# Altium PCB PCB Uno-BMS.PcbDoc
Units mil, origin at the board's own origin, x right, y up, seen from the top; angles counter-clockwise.
Board outline 2702.76 x 2098.43 mil, 2 copper layers (L1, L2), stack 65.8 mil thick; 126 components, 129 nets, 340 pads, 63 vias.
Unrouted connection lines stored in the file: 3.
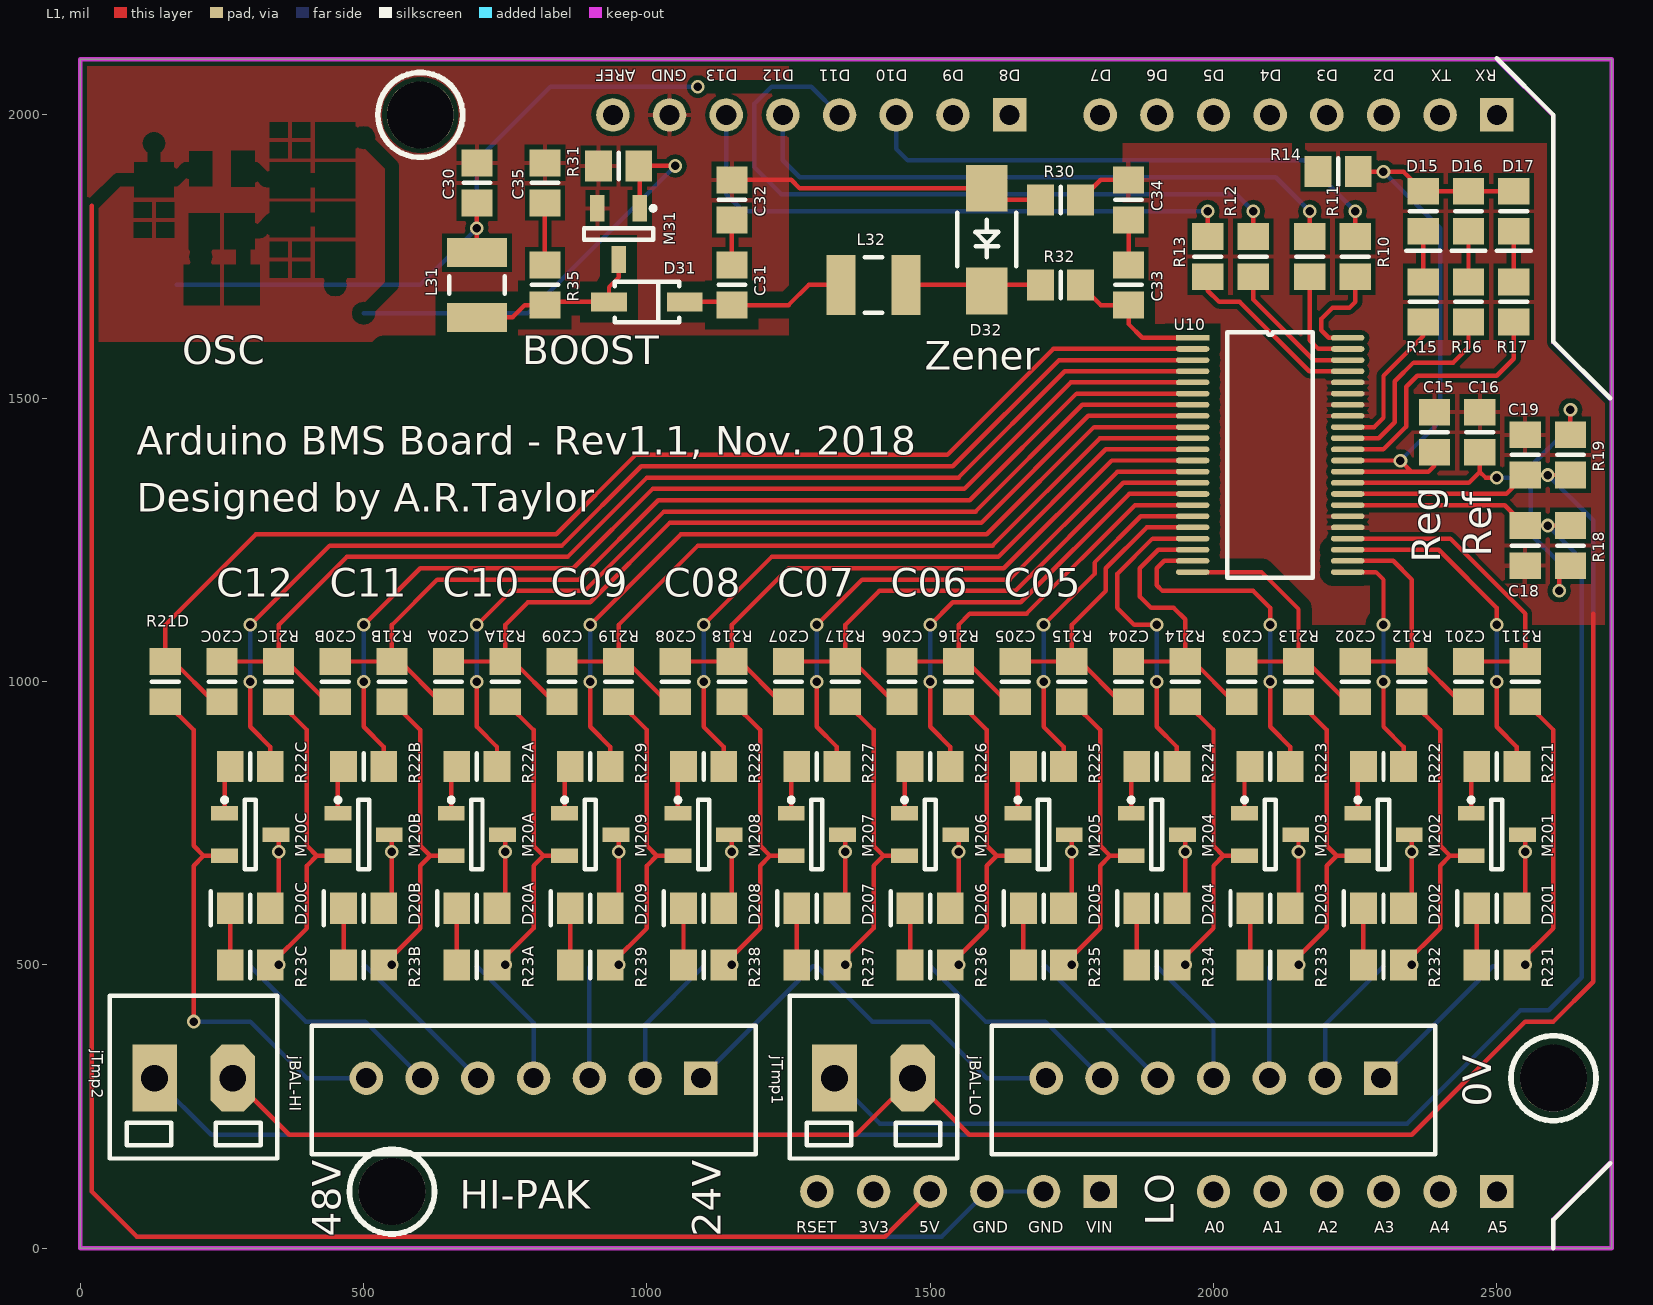
[diagram p0: L1 view]
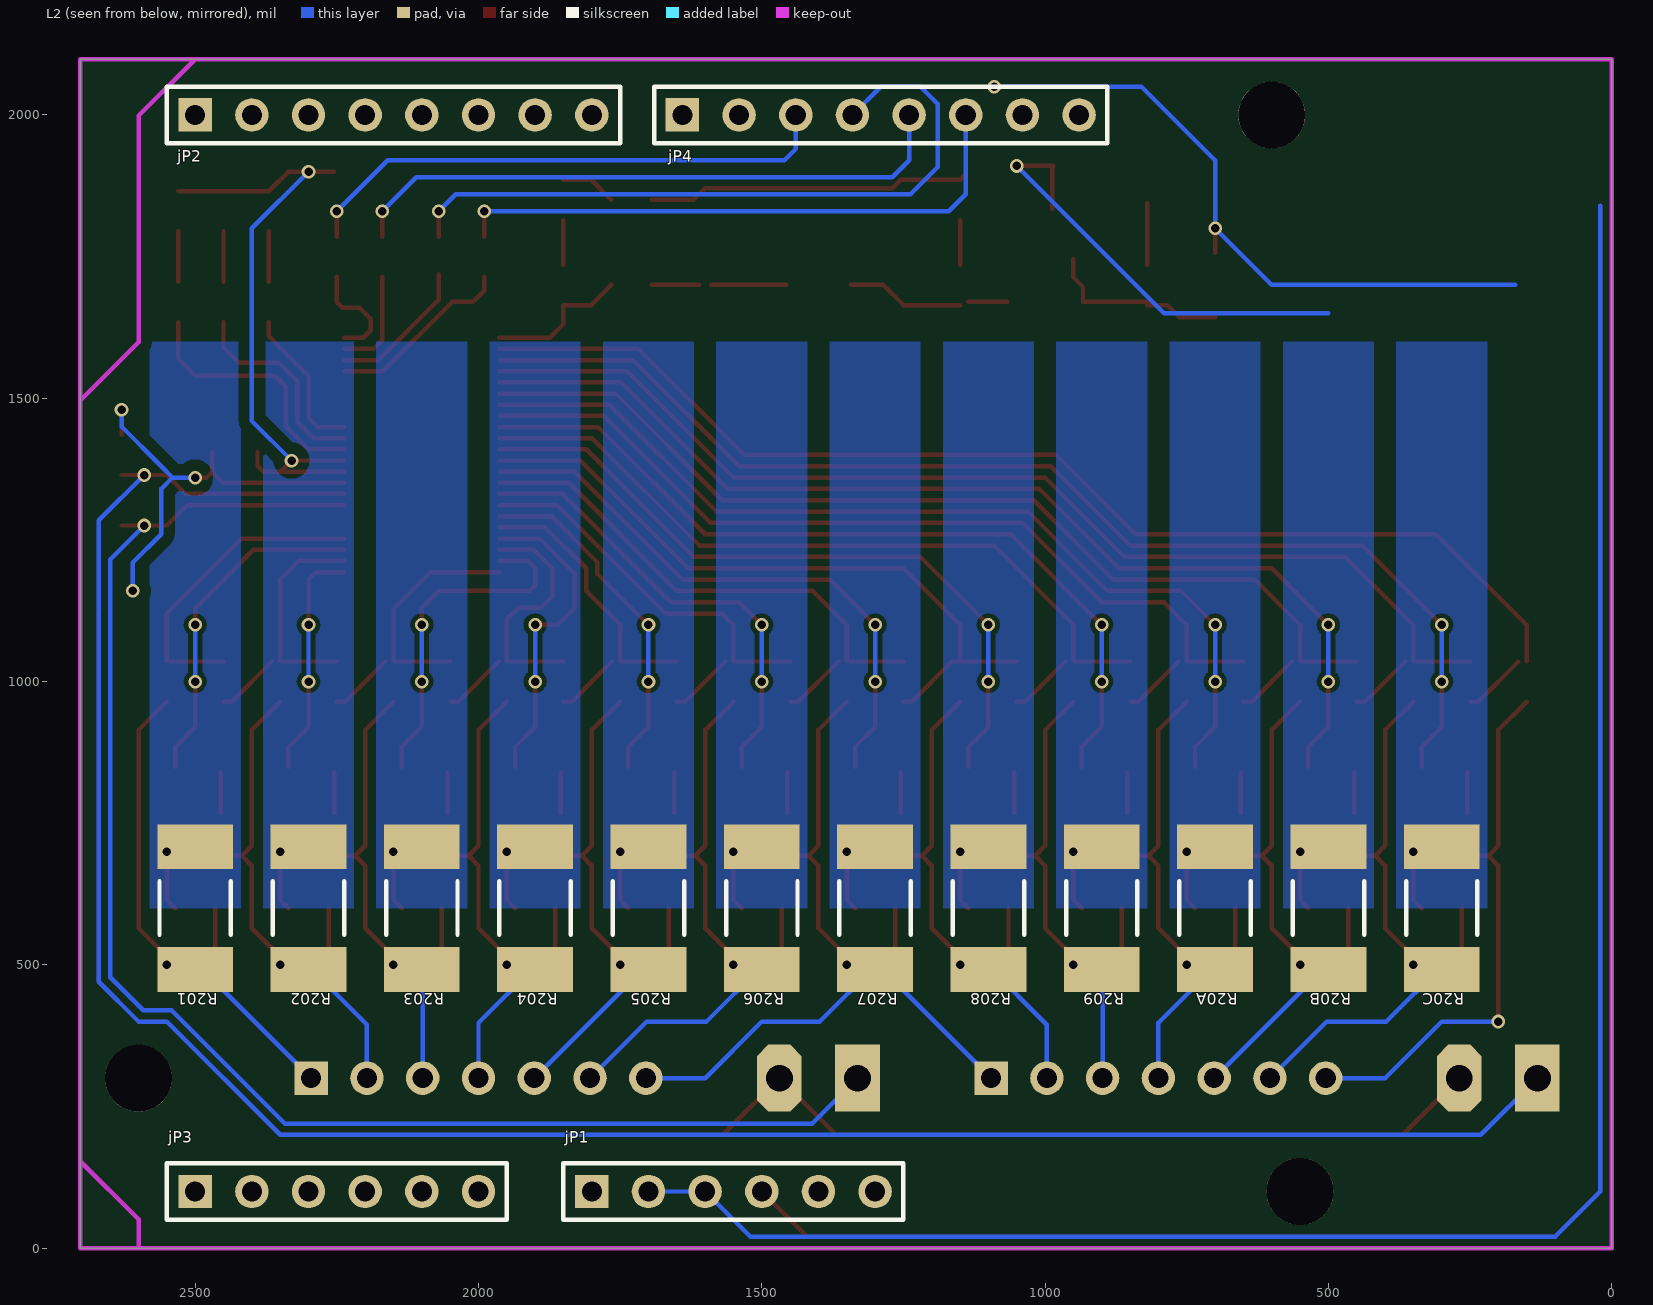
[diagram p1: L2 view, seen from below]

## Layer stack, top to bottom
L1: signal copper 1.4
Dielectric: core 63, FR-4, Dk 4.8
L2: signal copper 1.4

## Board outline
0,0 2702.76,0 2702.76,2098.43 0,2098.43

## Design rules (kind name [scope] priority, off if disabled: settings)
AssemblyTestPointUsage [All] p1 off:
AssemblyTestpoint [All] p1: testpointundercomponent=FALSE minsize=40 maxsize=100 preferedsize=60 minholesize=0 maxholesize=40 preferedholesize=32 testpointgrid=3.94 usegrid=TRUE gridoriginx=3496.06 gridoriginy=3000 gridtolerance=0.01 allowsidetop=TRUE allowsidebottom=TRUE
Clearance "Mount Holes" [HoleDiameter >= 3] p1 off: gap=20
Clearance HighSide [InNet('+Vb') vs InNet('C12')] p2: gap=8
Clearance LowSide [InNet('-Vb') vs InNet('C0')] p3: gap=8
Clearance HV2All [InNetClass('HV Nets') vs NOT InNetClass('HV Nets')] p4: gap=20
Clearance MV2All [InNetClass('MV Nets') vs NOT InNetClass('MV Nets')] p5: gap=20
Clearance LV2LV [All] p6: gap=8
ComponentClearance "Arduino Uno" [Id=('Arduino-UNO') vs HasFootprint('HDR1X*')] p1: gap=0 collisioncheckmode=3 verticalgap=0 showdistances=FALSE
ComponentClearance [All] p2: gap=7.87 collisioncheckmode=3 verticalgap=7.87 showdistances=FALSE
DiffPairsRouting [All] p1: maxlimit=78.74 minlimit=7.87 mostfreqgap=7.87 maxuncoupledlength=500
FabricationTestPointUsage [All] p1 off: valid=0 allowmultiple=FALSE
FabricationTestpoint [All] p1: side=3 testpointundercomponent=FALSE minsize=40 maxsize=100 preferedsize=60 minholesize=0 maxholesize=40 preferedholesize=32 testpointgrid=3.94 allowsidetop=TRUE allowsidebottom=TRUE usegrid=TRUE gridoriginx=3496.06 gridoriginy=3000 gridtolerance=0.01
Height [All] p1: minheight=0 maxheight=2362.2 prefheight=500
HoleSize [All] p1: absolutevalues=TRUE maxlimit=984.25 minlimit=1.97 maxpercent=80.000 minpercent=20.000
HoleToHoleClearance [All] p1: gap=7.87 allowstackedmicrovias=TRUE
MinimumSolderMaskSliver [All] p1: minsoldermaskwidth=1
PlaneClearance [All] p1: clearance=19.68
PlaneConnect [All] p1: planeconnectstyle=Relief reliefexpansion=19.68 reliefentries=4 reliefconductorwidth=9.84 reliefairgap=9.84
PolygonConnect HeatSinks [InNet('BALR*')] p1: connectstyle=Direct reliefconductorwidth=10 reliefentries=4 polygonreliefangle="90 Angle"
PolygonConnect SolidVia [ViaSize = 0.65] p2: connectstyle=Direct reliefconductorwidth=10 reliefentries=4 polygonreliefangle="90 Angle"
PolygonConnect PolyConnect [All vs IsPolygon] p3: connectstyle=Relief reliefconductorwidth=8 reliefentries=4 polygonreliefangle="90 Angle"
RoomDefinition 1 [InComponentClass('1')] p1: confinementstyle=ConfineIn formatcopy=FALSE lockcomponents=FALSE outline 2600,400 2600,1100 2400,1100 2400,400
RoomDefinition C [InComponentClass('C')] p2: confinementstyle=ConfineIn formatcopy=TRUE lockcomponents=FALSE outline 400,400 400,1100 200,1100 200,400
RoomDefinition B [InComponentClass('B')] p3: confinementstyle=ConfineIn formatcopy=TRUE lockcomponents=FALSE outline 600,400 600,1100 400,1100 400,400
RoomDefinition A [InComponentClass('A')] p4: confinementstyle=ConfineIn formatcopy=TRUE lockcomponents=FALSE outline 800,400 800,1100 600,1100 600,400
RoomDefinition 9 [InComponentClass('9')] p5: confinementstyle=ConfineIn formatcopy=TRUE lockcomponents=FALSE outline 1000,400 1000,1100 800,1100 800,400
RoomDefinition 8 [InComponentClass('8')] p6: confinementstyle=ConfineIn formatcopy=TRUE lockcomponents=FALSE outline 1200,400 1200,1100 1000,1100 1000,400
RoomDefinition 7 [InComponentClass('7')] p7: confinementstyle=ConfineIn formatcopy=TRUE lockcomponents=FALSE outline 1400,400 1400,1100 1200,1100 1200,400
RoomDefinition 6 [InComponentClass('6')] p8: confinementstyle=ConfineIn formatcopy=TRUE lockcomponents=FALSE outline 1600,400 1600,1100 1400,1100 1400,400
RoomDefinition 5 [InComponentClass('5')] p9: confinementstyle=ConfineIn formatcopy=TRUE lockcomponents=FALSE outline 1800,400 1800,1100 1600,1100 1600,400
RoomDefinition 4 [InComponentClass('4')] p10: confinementstyle=ConfineIn formatcopy=TRUE lockcomponents=FALSE outline 2000,400 2000,1100 1800,1100 1800,400
RoomDefinition 3 [InComponentClass('3')] p11: confinementstyle=ConfineIn formatcopy=TRUE lockcomponents=FALSE outline 2200,400 2200,1100 2000,1100 2000,400
RoomDefinition 2 [InComponentClass('2')] p12: confinementstyle=ConfineIn formatcopy=TRUE lockcomponents=FALSE outline 2400,400 2400,1100 2200,1100 2200,400
RoutingVias [All] p1: holewidth=19.68 width=29.53 viastyle="Through Hole" minholewidth=15 minwidth=23.62 maxholewidth=39.37 maxwidth=49.21
SilkToSilkClearance [All] p1: silktosilkclearance=2
SilkscreenOverComponentPads [IsPad] p1: minsilkscreentomaskgap=1.97
SolderMaskExpansion [All] p1: expansion=4
Width [All] p1: maxlimit=196.85 minlimit=7.87 preferedwidth=7.87
14 further rules are at their usual default settings.

## Classes and differential pairs
component class A: C20A C21A C22A C23A C24A C25A C26A C27A C28A D20A D21A jPhA M20A M21A M22A Q20A Q25A R20A R21A R22A R23A R24A R26A R27A R28A U21A U22A
component class B: C20B C21B C22B C23B C24B C25B C26B C27B C28B D20B D21B jPhB M20B M21B M22B Q20B Q25B R20B R21B R22B R23B R24B R26B R27B R28B U21B U22B
component class C: C20C C21C C22C C23C C24C C25C C26C C27C C28C D20C D21C jPhC M20C M21C M22C Q20C Q25C R20C R21C R22C R23C R24C R26C R27C R28C U21C U22C
net class "HV Nets": +VB NetC31_1 NetD31_1 NetD32_2
net class "LV Nets": 3V3 5V -VB A0 A1 A2 A3 A4 A5 AREF CSEL D2 D3 D4 D5 D6 D7 D8 D9 D10 D11 D12 D13 GND IO1 IO2 MISO MOSI NetD15_2 NetD16_2 NetD17_2 PWM9 PWM11 RESET RX SCLK TX VIN VREF VREG VTMP1 VTMP2 WD
component class 1: C201 D201 M201 R201 R211 R221 R231
component class 2: C202 D202 M202 R202 R212 R222 R232
component class 3: C203 D203 M203 R203 R213 R223 R233
component class 4: C204 D204 M204 R204 R214 R224 R234
component class 5: C205 D205 M205 R205 R215 R225 R235
component class 6: C206 D206 M206 R206 R216 R226 R236
component class 7: C207 D207 M207 R207 R217 R227 R237
component class 8: C208 D208 M208 R208 R218 R228 R238
component class 9: C209 D209 M209 R209 R219 R229 R239
net class "MV Nets": BALD1 BALD2 BALD3 BALD4 BALD5 BALD6 BALD7 BALD8 BALD9 BALDA BALDB BALDC BALG1 BALG2 BALG3 BALG4 BALG5 BALG6 BALG7 BALG8 BALG9 BALGA BALGB BALGC BALR1 BALR2 BALR3 BALR4 BALR5 BALR6 BALR7 BALR8 BALR9 BALRA BALRB BALRC C0 C1 C2 C3 C4 C5 C6 C7 C8 C9 C10 C11 C12 CELL0 CELL1 CELL2 CELL3 CELL4 CELL5 CELL6 CELL7 CELL8 CELL9 CELLA CELLB CELLC S1 S2 S3 S4 S5 S6 S7 S8 S9 S10 S11 S12
channel class "SCH Uno-CellTap": 1 2 3 4 5 6 7 8 9 A B C

## Components (designator, comment, footprint, x,y, rotation, side; value= is the part's Value field where it differs from the comment)
C15 "CL21F105ZBFNNNE" CAPC2012N 2390,1440 r270 top
C16 "CL21F105ZBFNNNE" CAPC2012N 2470,1440 r270 top
C18 "CL21F105ZBFNNNE" CAPC2012N 2550,1240 r90 top
C19 "CL21F105ZBFNNNE" CAPC2012N 2550,1400 r270 top
C20A "CL21F105ZBFNNNE" CAPC2012N 650,1000 r90 top (schematic designator C20)
C20B "CL21F105ZBFNNNE" CAPC2012N 450,1000 r90 top (schematic designator C20)
C20C "CL21F105ZBFNNNE" CAPC2012N 250,1000 r90 top (schematic designator C20)
C30 "CL21F105ZBFNNNE" CAPC2012N 700,1880 r90 top
C31 "CL21F105ZBFNNNE" CAPC2012N 1150,1700 r90 top
C32 "CL21F105ZBFNNNE" CAPC2012N 1150,1850 r90 top
C33 "CL21F105ZBFNNNE" CAPC2012N 1850,1700 r90 top
C34 "CL21F105ZBFNNNE" CAPC2012N 1850,1850 r90 top
C35 "C0805C102K1RACTU" CAPC2012N 820,1880 r90 top
C201 "CL21F105ZBFNNNE" CAPC2012N 2450,1000 r90 top (schematic designator C20)
C202 "CL21F105ZBFNNNE" CAPC2012N 2250,1000 r90 top (schematic designator C20)
C203 "CL21F105ZBFNNNE" CAPC2012N 2050,1000 r90 top (schematic designator C20)
C204 "CL21F105ZBFNNNE" CAPC2012N 1850,1000 r90 top (schematic designator C20)
C205 "CL21F105ZBFNNNE" CAPC2012N 1650,1000 r90 top (schematic designator C20)
C206 "CL21F105ZBFNNNE" CAPC2012N 1450,1000 r90 top (schematic designator C20)
C207 "CL21F105ZBFNNNE" CAPC2012N 1250,1000 r90 top (schematic designator C20)
C208 "CL21F105ZBFNNNE" CAPC2012N 1050,1000 r90 top (schematic designator C20)
C209 "CL21F105ZBFNNNE" CAPC2012N 850,1000 r90 top (schematic designator C20)
D15 "LTST-C170GKT" DIO2012N-G 2370,1830 r270 top
D16 "LTST-C170YKT" DIO2012N-Y 2450,1830 r270 top
D17 "LTST-C170CKT" DIO2012N-R 2530,1830 r270 top
D20A "LTST-C170YKT" DIO2012N-Y 700,600 r180 top (schematic designator D20)
D20B "LTST-C170YKT" DIO2012N-Y 500,600 r180 top (schematic designator D20)
D20C "LTST-C170YKT" DIO2012N-Y 300,600 r180 top (schematic designator D20)
D31 "SMD110PL-TP" SOD123 1000,1670 r180 top
D32 "SMAJ54A" DO214-SMA 1600,1780 r270 top
D201 "LTST-C170YKT" DIO2012N-Y 2500,600 r180 top (schematic designator D20)
D202 "LTST-C170YKT" DIO2012N-Y 2300,600 r180 top (schematic designator D20)
D203 "LTST-C170YKT" DIO2012N-Y 2100,600 r180 top (schematic designator D20)
D204 "LTST-C170YKT" DIO2012N-Y 1900,600 r180 top (schematic designator D20)
D205 "LTST-C170YKT" DIO2012N-Y 1700,600 r180 top (schematic designator D20)
D206 "LTST-C170YKT" DIO2012N-Y 1500,600 r180 top (schematic designator D20)
D207 "LTST-C170YKT" DIO2012N-Y 1300,600 r180 top (schematic designator D20)
D208 "LTST-C170YKT" DIO2012N-Y 1100,600 r180 top (schematic designator D20)
D209 "LTST-C170YKT" DIO2012N-Y 900,600 r180 top (schematic designator D20)
jBAL-HI "B7B-XH-A" JST-XH-B7 800,300 r180 top
jBAL-LO "B7B-XH-A" JST-XH-B7 2000,300 r180 top
jP1 "SSW-106-03-T-S" HDR1X6 1550,100 r180 bottom locked
jP2 "SSW-108-03-T-S" HDR1X8 2150,2000 r180 bottom locked
jP3 "SSW-106-03-T-S" HDR1X6 2250,100 r180 bottom locked
jP4 "SSW-108-03-T-S" HDR1X8 1290,2000 r180 bottom locked
jTmp1 "1751248" TERM2x3.5mm 1400,300 r0 top
jTmp2 "1751248" TERM2x3.5mm 200,300 r0 top
L31 "BRL3225T101K" INDC3225N 700,1700 r270 top
L32 "BRL3225T101K" INDC3225N 1400,1700 r0 top
M20A "NTR5105PT1G" SOT23-3N 700,730 r0 top (schematic designator M20)
M20B "NTR5105PT1G" SOT23-3N 500,730 r0 top (schematic designator M20)
M20C "NTR5105PT1G" SOT23-3N 300,730 r0 top (schematic designator M20)
M31 "BSS119NH6327XTSA1" SOT23-3N 950,1790 r270 top
M201 "NTR5105PT1G" SOT23-3N 2500,730 r0 top (schematic designator M20)
M202 "NTR5105PT1G" SOT23-3N 2300,730 r0 top (schematic designator M20)
M203 "NTR5105PT1G" SOT23-3N 2100,730 r0 top (schematic designator M20)
M204 "NTR5105PT1G" SOT23-3N 1900,730 r0 top (schematic designator M20)
M205 "NTR5105PT1G" SOT23-3N 1700,730 r0 top (schematic designator M20)
M206 "NTR5105PT1G" SOT23-3N 1500,730 r0 top (schematic designator M20)
M207 "NTR5105PT1G" SOT23-3N 1300,730 r0 top (schematic designator M20)
M208 "NTR5105PT1G" SOT23-3N 1100,730 r0 top (schematic designator M20)
M209 "NTR5105PT1G" SOT23-3N 900,730 r0 top (schematic designator M20)
R10 "ERJ-6ENF10R0V" RESC2012N 2250,1750 r90 top
R11 "ERJ-6ENF10R0V" RESC2012N 2170,1750 r90 top
R12 "ERJ-6ENF10R0V" RESC2012N 2070,1750 r90 top
R13 "ERJ-6ENF10R0V" RESC2012N 1990,1750 r90 top
R14 "ERJ-6ENF10R0V" RESC2012N 2220,1900 r180 top
R15 "ERJ-6ENF1001V" RESC2012N 2370,1670 r270 top
R16 "ERJ-6ENF1001V" RESC2012N 2450,1670 r270 top
R17 "ERJ-6ENF1001V" RESC2012N 2530,1670 r270 top
R18 "ERJ-6ENF1003V" RESC2012N 2630,1240 r90 top
R19 "ERJ-6ENF1003V" RESC2012N 2630,1400 r270 top
R20A "RMCF2512FT49R9" RESC6432N 700,600 r90 bottom (schematic designator R20)
R20B "RMCF2512FT49R9" RESC6432N 500,600 r90 bottom (schematic designator R20)
R20C "RMCF2512FT49R9" RESC6432N 300,600 r90 bottom (schematic designator R20)
R21A "ERJ-6ENF1000V" RESC2012N 750,1000 r90 top (schematic designator R21)
R21B "ERJ-6ENF1000V" RESC2012N 550,1000 r90 top (schematic designator R21)
R21C "ERJ-6ENF1000V" RESC2012N 350,1000 r90 top (schematic designator R21)
R21D "ERJ-6ENF1000V" RESC2012N 150,1000 r90 top
R22A "ERJ-6ENF1001V" RESC2012N 700,850 r180 top (schematic designator R22)
R22B "ERJ-6ENF1001V" RESC2012N 500,850 r180 top (schematic designator R22)
R22C "ERJ-6ENF1001V" RESC2012N 300,850 r180 top (schematic designator R22)
R23A "ERJ-6ENF1001V" RESC2012N 700,500 r180 top (schematic designator R23)
R23B "ERJ-6ENF1001V" RESC2012N 500,500 r180 top (schematic designator R23)
R23C "ERJ-6ENF1001V" RESC2012N 300,500 r180 top (schematic designator R23)
R30 "ERJ-6ENF10R0V" RESC2012N 1730,1850 r0 top
R31 "ERJ-6ENF1002V" RESC2012N 950,1910 r180 top
R32 "ERJ-6ENF1000V" RESC2012N 1730,1700 r0 top
R35 "ERJ-6ENF1001V" RESC2012N 820,1700 r90 top
R201 "RMCF2512FT49R9" RESC6432N 2500,600 r90 bottom (schematic designator R20)
R202 "RMCF2512FT49R9" RESC6432N 2300,600 r90 bottom (schematic designator R20)
R203 "RMCF2512FT49R9" RESC6432N 2100,600 r90 bottom (schematic designator R20)
R204 "RMCF2512FT49R9" RESC6432N 1900,600 r90 bottom (schematic designator R20)
R205 "RMCF2512FT49R9" RESC6432N 1700,600 r90 bottom (schematic designator R20)
R206 "RMCF2512FT49R9" RESC6432N 1500,600 r90 bottom (schematic designator R20)
R207 "RMCF2512FT49R9" RESC6432N 1300,600 r90 bottom (schematic designator R20)
R208 "RMCF2512FT49R9" RESC6432N 1100,600 r90 bottom (schematic designator R20)
R209 "RMCF2512FT49R9" RESC6432N 900,600 r90 bottom (schematic designator R20)
R211 "ERJ-6ENF1000V" RESC2012N 2550,1000 r90 top (schematic designator R21)
R212 "ERJ-6ENF1000V" RESC2012N 2350,1000 r90 top (schematic designator R21)
R213 "ERJ-6ENF1000V" RESC2012N 2150,1000 r90 top (schematic designator R21)
R214 "ERJ-6ENF1000V" RESC2012N 1950,1000 r90 top (schematic designator R21)
R215 "ERJ-6ENF1000V" RESC2012N 1750,1000 r90 top (schematic designator R21)
R216 "ERJ-6ENF1000V" RESC2012N 1550,1000 r90 top (schematic designator R21)
R217 "ERJ-6ENF1000V" RESC2012N 1350,1000 r90 top (schematic designator R21)
R218 "ERJ-6ENF1000V" RESC2012N 1150,1000 r90 top (schematic designator R21)
R219 "ERJ-6ENF1000V" RESC2012N 950,1000 r90 top (schematic designator R21)
R221 "ERJ-6ENF1001V" RESC2012N 2500,850 r180 top (schematic designator R22)
R222 "ERJ-6ENF1001V" RESC2012N 2300,850 r180 top (schematic designator R22)
R223 "ERJ-6ENF1001V" RESC2012N 2100,850 r180 top (schematic designator R22)
R224 "ERJ-6ENF1001V" RESC2012N 1900,850 r180 top (schematic designator R22)
R225 "ERJ-6ENF1001V" RESC2012N 1700,850 r180 top (schematic designator R22)
R226 "ERJ-6ENF1001V" RESC2012N 1500,850 r180 top (schematic designator R22)
R227 "ERJ-6ENF1001V" RESC2012N 1300,850 r180 top (schematic designator R22)
R228 "ERJ-6ENF1001V" RESC2012N 1100,850 r180 top (schematic designator R22)
R229 "ERJ-6ENF1001V" RESC2012N 900,850 r180 top (schematic designator R22)
R231 "ERJ-6ENF1001V" RESC2012N 2500,500 r180 top (schematic designator R23)
R232 "ERJ-6ENF1001V" RESC2012N 2300,500 r180 top (schematic designator R23)
R233 "ERJ-6ENF1001V" RESC2012N 2100,500 r180 top (schematic designator R23)
R234 "ERJ-6ENF1001V" RESC2012N 1900,500 r180 top (schematic designator R23)
R235 "ERJ-6ENF1001V" RESC2012N 1700,500 r180 top (schematic designator R23)
R236 "ERJ-6ENF1001V" RESC2012N 1500,500 r180 top (schematic designator R23)
R237 "ERJ-6ENF1001V" RESC2012N 1300,500 r180 top (schematic designator R23)
R238 "ERJ-6ENF1001V" RESC2012N 1100,500 r180 top (schematic designator R23)
R239 "ERJ-6ENF1001V" RESC2012N 900,500 r180 top (schematic designator R23)
U10 "LTC6803-4" SSOP44 2100,1400 r0 top

## Footprints (in the part's own frame and the unit in brackets; to place one, negate y for a bottom-side part, rotate by r counter-clockwise, add the part's x,y. Pads: shape width x height; smd on the part's side, far side on the other; paste and mask are expansions set on the pad)
CAPC2012N [mm] "Chip Capacitor, Body 2.0x1.3mm, IPC Medium Density"
  rect 1.2x1.4 smd: 1(-0.9,0) 2(0.9,0)
  silkscreen extent 0,-0.6 0,0.6, body extent -1.07,-0.7 1.07,0.7, height 0.7
DIO2012N-G [mm] "Chip Diode, Body 2.0x1.2mm, Medium Density"
  rect 1.2x1.4 smd: 1(-0.9,0) 2(0.9,0)
  silkscreen extent 0,-0.76 1.78,0.76, body extent -1.07,-0.7 1.07,0.7, height 0.7
DIO2012N-R [mm] "Chip Diode, Body 2.0x1.2mm, Medium Density"
  rect 1.2x1.4 smd: 1(-0.9,0) 2(0.9,0)
  silkscreen extent 0,-0.76 1.78,0.76, body extent -1.07,-0.7 1.07,0.7, height 0.7
DIO2012N-Y [mm] "Chip Diode, Body 2.0x1.2mm, Medium Density"
  rect 1.2x1.4 smd: 1(-0.9,0) 2(0.9,0)
  silkscreen extent 0,-0.76 1.78,0.76, body extent -1.07,-0.7 1.07,0.7, height 0.7
DO214-SMA [mm] "DO-214-AC/SMA; 2 C-Bend Leads; Body 5.3 x 2.6 mm, inc. leads (LxW)"
  rect 2.1x1.85 smd: 1(-2.3,0) 2(2.3,0)
  silkscreen extent -1.2,-1.33 1.2,1.33, body extent -2.5,-1.35 2.5,1.35, height 2.2
HDR1X6 [mm] "Connector; Header; 6 Position"
  rect 1.5x1.5 hole 0.9: 1(-6.35,0)
  round 1.5 hole 0.9: 2(-3.81,0) 3(-1.27,0) 4(1.27,0) 5(3.81,0) 6(6.35,0)
  silkscreen extent -7.62,-1.27 7.62,1.27, body extent -7.62,-1.27 7.62,1.27, height 8
HDR1X8 [mm] "Connector; Header; 8 Position"
  rect 1.5x1.5 hole 0.9: 1(-8.89,0)
  round 1.5 hole 0.9: 2(-6.35,0) 3(-3.81,0) 4(-1.27,0) 5(1.27,0) 6(3.81,0) 7(6.35,0) 8(8.89,0)
  silkscreen extent -10.16,-1.27 10.16,1.27, body extent -10.16,-1.27 10.16,1.27, height 8
INDC3225N [mm] "Chip Inductor, Body 3.2x2.5mm, IPC Medium Density"
  rect 1.3x2.7 smd: 1(-1.45,0) 2(1.45,0)
  silkscreen extent -0.4,-1.25 0.4,1.25, body extent -1.7,-1.35 1.7,1.35, height 1.5
JST-XH-B7 [mm] "Locking Connector; Top-Entry; Header; 7 Position"
  rect 1.5x1.5 hole 0.9: 1(-7.5,0)
  round 1.5 hole 0.9: 2(-5,0) 3(-2.5,0) 4(0,0) 5(2.5,0) 6(5,0) 7(7.5,0)
  silkscreen extent -9.95,-2.35 9.95,3.4, body extent -9.95,-2.35 9.95,3.4, height 7
RESC2012N [mm] "Chip Resistor, Body 2.0x1.2mm, IPC Medium Density"
  rect 1.2x1.4 smd: 1(-0.9,0) 2(0.9,0)
  silkscreen extent 0,-0.6 0,0.6, body extent -1.07,-0.7 1.07,0.7, height 0.7
RESC6432N [mm] "Chip Resistor, Body 6.4x3.2mm, IPC Medium Density"
  rect 2x3.4 smd: 1(-2.75,0) 2(2.75,0)
  silkscreen extent -1.2,-1.6 1.2,1.6, body extent -3.3,-1.7 3.3,1.7, height 1.2
SOD123 [mm] "SOD-123; 2 Leads; Body 2.7 x 1.6 mm, (LxW)"
  rect 1.6x0.85 smd: 1(1.7,0) 2(-1.7,0)
  silkscreen extent -1.45,-0.9 1.45,0.9, body extent -1.95,-0.9 1.95,0.9, height 1.18
SOT23-3N [mm] "SOT23, 3-Leads, Body 2.9x1.3mm, Pitch 0.95mm, Lead Span 2.8mm, IPC Medium Density"
  rect 1.2x0.65 smd: 1(-1.15,0.95) 2(-1.15,-0.95) 3(1.15,0)
  silkscreen extent -1.25,-1.55 0.25,1.65, body extent -1.25,-1.5 1.25,1.5, height 1
SSOP44 [mm] "44-Lead Plastic SSOP, 5.3mm width, 0.5mm pitch"
  rect 1.5x0.25 smd: 1(-3.475,5.25)
  oval 1.5x0.25 smd: 2(-3.475,4.75) 3(-3.475,4.25) 4(-3.475,3.75) 5(-3.475,3.25) 6(-3.475,2.75) 7(-3.475,2.25) 8(-3.475,1.75) 9(-3.475,1.25) 10(-3.475,0.75) 11(-3.475,0.25) 12(-3.475,-0.25) 13(-3.475,-0.75) 14(-3.475,-1.25) 15(-3.475,-1.75) 16(-3.475,-2.25) 17(-3.475,-2.75) 18(-3.475,-3.25) 19(-3.475,-3.75) 20(-3.475,-4.25) 21(-3.475,-4.75) 22(-3.475,-5.25) 23(3.475,-5.25) 24(3.475,-4.75) 25(3.475,-4.25) 26(3.475,-3.75) 27(3.475,-3.25) 28(3.475,-2.75) 29(3.475,-2.25) 30(3.475,-1.75) 31(3.475,-1.25) 32(3.475,-0.75) 33(3.475,-0.25) 34(3.475,0.25) 35(3.475,0.75) 36(3.475,1.25) 37(3.475,1.75) 38(3.475,2.25) 39(3.475,2.75) 40(3.475,3.25) 41(3.475,3.75) 42(3.475,4.25) 43(3.475,4.75) 44(3.475,5.25)
  silkscreen extent -1.91,-5.5 1.91,5.5, body extent -2.65,-6.4 2.65,6.4, height 2
TERM2x3.5mm [mm] "Terminal Block Connector; 2 Position, 3.5mm Pitch"
  rect 2x3 hole 1.2: 1(-1.75,0)
  oct 2x3 hole 1.2: 2(1.75,0)
  silkscreen extent -3.75,-3.6 3.75,3.7, body extent -3.75,-3.6 3.75,3.7, height 8.5

## Part data
C15 C16 C18 C19 C20A C20B C20C C30 C31 C32 C33 C34 C35 C201 C202 C203 C204 C205 C206 C207 C208 C209: library part Cap, "Capacitor"
D15: "SMT Green Si LED"
D16 D20A D20B D20C D201 D202 D203 D204 D205 D206 D207 D208 D209: "SMT Yellow Si LED"
D17: "SMT Red Si LED"
D31: "Silicon Schottky Diode, 1A, 100V"
D32: library part "D Zener", "Zener Diode"
jBAL-HI jBAL-LO: library part "JST B7B-XH-A", "JST Battery Balance Port Header, 7-Pin"
jP1 jP3: library part "Header 6", "Header, 6-Pin"
jP2 jP4: library part "Header 8", "Header, 8-Pin"
jTmp1 jTmp2: library part "Header 2", "Header Conn Term Block, 2-Pin, 3.5mm Pitch"
L31 L32: library part BLM21P221SN, "Ferrite Bead Inductor"
M20A M20B M20C M201 M202 M203 M204 M205 M206 M207 M208 M209: library part MOSFET-P, "P-Channel MOSFET"
M31: library part BSS123, "Low-Power N-Channel MOSFET, 100V 170mA"
R10 R11 R12 R13 R14 R15 R16 R17 R18 R19 R21A R21B R21C R21D R22A R22B R22C R23A R23B R23C R30 R31 R32 R35 R211 R212 R213 R214 R215 R216 R217 R218 R219 R221 R222 R223 R224 R225 R226 R227 R228 R229 R231 R232 R233 R234 R235 R236 R237 R238 R239: library part Res1, "Resistor"
R20A R20B R20C R201 R202 R203 R204 R205 R206 R207 R208 R209: library part Res1, "Resistor, 1W"
U10: "Multicell Battery Stack Monitor"

## Free pads (board coordinates)
  round 118.11 hole 118.11 unplated: 0(550,100) 0(600,2000) 0(2600,300)

## Via types
v1: diameter 24, hole 15, L1 to L2, tented both sides, 63 vias

## Nets (pads, with @x,y where several pads share a name; then routed paths per layer and width w, separated by ;. In a path a pad name is that pad's centre, name@x,y a point inside that pad or via, vN(x,y) a via of type N, cw(c..) or ccw(c..) an arc to the next point about the centre after c; other vN are vias at no path point)
3V3: jP1.5
5V: C30.1 jP1.4 L31.1 R14.2 | length 4509
  L1 w7.87: 20,1840 20,100 100,20 1420,20 jP1.4 ; L31.1 v1(700,1800) C30.1
  L2 w7.87: 170,1700 600,1700 v1(700,1800) 700,1920 830,2050 v1(1090,2050)
+VB: C33.1 R32.2 U10.1 | length 256
  L1 w7.87: R32.2 1800.87,1664.57 C33.1 1850,1631.1 1874.41,1606.69 U10.1
-VB: C15.1 C16.1 C18.1 C19.1 C34.2 jTmp1.2 jTmp2.2 R30.2 U10.27 U10.28 U10.37 U10.38 U10.39 U10.40 | length 3386.4
  L1 w7.87: jTmp2.2 368.9,200 1368.9,200 jTmp1.2 1568.9,200 2350,200 2550,400 2600,400 2670,470 2670,1120 ; R30.2 1800.87,1885.43 C34.2
A0: jP3.6
A1: jP3.5
A2: jP3.4
A3: jP3.3
A4: jP3.2
A5: jP3.1
AREF: jP4.8
BALD1: D201.2 R231.2 | length 100
  L1 w7.87: R231.2 D201.2
BALD2: D202.2 R232.2 | length 100
  L1 w7.87: R232.2 D202.2
BALD3: D203.2 R233.2 | length 100
  L1 w7.87: R233.2 D203.2
BALD4: D204.2 R234.2 | length 100
  L1 w7.87: R234.2 D204.2
BALD5: D205.2 R235.2 | length 100
  L1 w7.87: R235.2 D205.2
BALD6: D206.2 R236.2 | length 100
  L1 w7.87: R236.2 D206.2
BALD7: D207.2 R237.2 | length 100
  L1 w7.87: R237.2 D207.2
BALD8: D208.2 R238.2 | length 100
  L1 w7.87: R238.2 D208.2
BALD9: D209.2 R239.2 | length 100
  L1 w7.87: R239.2 D209.2
BALDA: D20A.2 R23A.2 | length 100
  L1 w7.87: R23A.2 D20A.2
BALDB: D20B.2 R23B.2 | length 100
  L1 w7.87: R23B.2 D20B.2
BALDC: D20C.2 R23C.2 | length 100
  L1 w7.87: R23C.2 D20C.2
BALG1: M201.1 R221.2 | length 72.8
  L1 w7.87: M201.1 R221.2@2454.72,840.16
BALG2: M202.1 R222.2 | length 72.8
  L1 w7.87: M202.1 R222.2@2254.72,840.16
BALG3: M203.1 R223.2 | length 72.8
  L1 w7.87: M203.1 R223.2@2054.72,840.16
BALG4: M204.1 R224.2 | length 72.8
  L1 w7.87: M204.1 R224.2@1854.72,840.16
BALG5: M205.1 R225.2 | length 72.8
  L1 w7.87: M205.1 R225.2@1654.72,840.16
BALG6: M206.1 R226.2 | length 72.8
  L1 w7.87: M206.1 R226.2@1454.72,840.16
BALG7: M207.1 R227.2 | length 72.8
  L1 w7.87: M207.1 R227.2@1254.72,840.16
BALG8: M208.1 R228.2 | length 72.8
  L1 w7.87: M208.1 R228.2@1054.72,840.16
BALG9: M209.1 R229.2 | length 72.8
  L1 w7.87: M209.1 R229.2@854.72,840.16
BALGA: M20A.1 R22A.2 | length 72.8
  L1 w7.87: M20A.1 R22A.2@654.72,840.16
BALGB: M20B.1 R22B.2 | length 72.8
  L1 w7.87: M20B.1 R22B.2@454.72,840.16
BALGC: M20C.1 R22C.2 | length 72.8
  L1 w7.87: M20C.1 R22C.2@254.72,840.16
BALR1: D201.1 M201.3 R201.2 | length 124.6
  L1 w7.87: D201.1 D201.1@2545.28,609.84 ; D201.1@2550,614.57 v1(2550,700) M201.3@2550,725.28
BALR2: D202.1 M202.3 R202.2 | length 124.6
  L1 w7.87: D202.1 D202.1@2345.28,609.84 ; D202.1@2350,614.57 v1(2350,700) M202.3@2350,725.28
BALR3: D203.1 M203.3 R203.2 | length 124.6
  L1 w7.87: D203.1 D203.1@2145.28,609.84 ; D203.1@2150,614.57 v1(2150,700) M203.3@2150,725.28
BALR4: D204.1 M204.3 R204.2 | length 124.6
  L1 w7.87: D204.1 D204.1@1945.28,609.84 ; D204.1@1950,614.57 v1(1950,700) M204.3@1950,725.28
BALR5: D205.1 M205.3 R205.2 | length 124.6
  L1 w7.87: D205.1 D205.1@1745.28,609.84 ; D205.1@1750,614.57 v1(1750,700) M205.3@1750,725.28
BALR6: D206.1 M206.3 R206.2 | length 124.6
  L1 w7.87: D206.1 D206.1@1545.28,609.84 ; D206.1@1550,614.57 v1(1550,700) M206.3@1550,725.28
BALR7: D207.1 M207.3 R207.2 | length 124.6
  L1 w7.87: D207.1 D207.1@1345.28,609.84 ; D207.1@1350,614.57 v1(1350,700) M207.3@1350,725.28
BALR8: D208.1 M208.3 R208.2 | length 124.6
  L1 w7.87: D208.1 D208.1@1145.28,609.84 ; D208.1@1150,614.57 v1(1150,700) M208.3@1150,725.28
BALR9: D209.1 M209.3 R209.2 | length 124.6
  L1 w7.87: D209.1 D209.1@945.28,609.84 ; D209.1@950,614.57 v1(950,700) M209.3@950,725.28
BALRA: D20A.1 M20A.3 R20A.2 | length 124.6
  L1 w7.87: D20A.1 D20A.1@745.28,609.84 ; D20A.1@750,614.57 v1(750,700) M20A.3@750,725.28
BALRB: D20B.1 M20B.3 R20B.2 | length 124.6
  L1 w7.87: D20B.1 D20B.1@545.28,609.84 ; D20B.1@550,614.57 v1(550,700) M20B.3@550,725.28
BALRC: D20C.1 M20C.3 R20C.2 | length 124.6
  L1 w7.87: D20C.1 D20C.1@345.28,609.84 ; D20C.1@350,614.57 v1(350,700) M20C.3@350,725.28
C0: C201.2 R211.2 U10.26 | length 552.6
  L1 w7.87: U10.26 2417.64,1252.36 2550,1120 R211.2 C201.2
C1: C201.1 C202.2 R212.2 U10.24 | length 486.2
  L1 w7.87: U10.24 2317.01,1212.99 2350,1180 R212.2 C202.2 ; R212.2@2364.57,1035.43 2435.43,964.57 C201.1
C2: C202.1 C203.2 R213.2 U10.22 | length 521.2
  L1 w7.87: U10.22 2084.72,1193.31 2150,1128.03 R213.2 C203.2 ; R213.2@2164.57,1035.43 2235.43,964.57 C202.1
C3: C203.1 C204.2 R214.2 U10.20 | length 542.6
  L1 w7.87: C204.2 R214.2 1950,1110 1930,1130 1890,1130 1870,1150 1870,1200 1902.68,1232.68 U10.20 ; R214.2@1964.57,1035.43 2035.43,964.57 C203.1
C4: C204.1 C205.2 R215.2 U10.18 | length 587.2
  L1 w7.87: C205.2 R215.2 1750,1100 1810,1160 1810,1200 1882.05,1272.05 U10.18 ; R215.2@1764.57,1035.43 1835.43,964.57 C204.1
C5: C205.1 C206.2 R216.2 U10.16 | length 780.1
  L1 w7.87: C206.2 R216.2 1550,1100 1570,1120 1670,1120 1861.42,1311.42 U10.16 ; R216.2@1564.57,1035.43 1635.43,964.57 C205.1
C6: C206.1 C207.2 R217.2 U10.14 | length 996.4
  L1 w7.87: C207.2 R217.2 1350,1100 1410,1160 1650,1160 1840.79,1350.79 U10.14 ; R217.2@1364.57,1035.43 1435.43,964.57 C206.1
C7: C207.1 C208.2 R218.2 U10.12 | length 1227.3
  L1 w7.87: C208.2 R218.2 ; C207.1 1235.43,964.57 1164.57,1035.43 R218.2 ; U10.12 1820.16,1390.16 1630,1200 1250,1200 1150,1100 R218.2
C8: C208.1 C209.2 R219.2 U10.10 | length 1429
  L1 w7.87: C209.2 R219.2 950,1100 1090,1240 1610,1240 1799.53,1429.53 U10.10 ; R219.2@964.57,1035.43 1035.43,964.57 C208.1
C9: C20A.2 C209.1 R21A.2 U10.8 | length 1645.3
  L1 w7.87: C20A.2 R21A.2 750,1100 790,1140 900,1140 1040,1280 1590,1280 1778.9,1468.9 U10.8 ; R21A.2@764.57,1035.43 835.43,964.57 C209.1
C10: C20A.1 C20B.2 R21B.2 U10.6 | length 1861.7
  L1 w7.87: C20B.2 R21B.2 550,1100 630,1180 880,1180 1020,1320 1570,1320 1758.27,1508.27 U10.6 ; R21B.2@564.57,1035.43 635.43,964.57 C20A.1
C11: C20B.1 C20C.2 R21C.2 U10.4 | length 2078
  L1 w7.87: C20C.2 R21C.2 350,1100 470,1220 860,1220 1000,1360 1550,1360 1737.64,1547.64 U10.4 ; R21C.2@364.57,1035.43 435.43,964.57 C20B.1
C12: C20C.1 R21D.2 U10.2 | length 2194.3
  L1 w7.87: R21D.2 150,1100 310,1260 840,1260 980,1400 1530,1400 1717.01,1587.01 U10.2 ; R21D.2@164.57,1035.43 235.43,964.57 C20C.1
CELL0: jBAL-LO.1 R201.1 R211.1 R231.1 | length 798.6
  L1 w7.87: R231.1 2600,564.57 2600,914.57 R211.1
  L2 w7.87: jBAL-LO.1 2492.91,497.64 R201.1@2500,497.64
  other v1: 2550,500
CELL1: jBAL-LO.2 M201.2 R202.1 R212.1 R232.1 | length 804.1
  L1 w7.87: R232.1 2400,564.57 2400,675.2 2417.4,692.6 ; R212.1 2400,914.57 2400,710 2417.4,692.6 ; M201.2 2417.4,692.6
  L2 w7.87: jBAL-LO.2 2196.85,394.49 R202.1@2300,497.64
  other v1: 2350,500
CELL2: jBAL-LO.3 M202.2 R203.1 R213.1 R233.1 | length 759.8
  L1 w7.87: R233.1 2200,564.57 2200,675.2 2217.4,692.6 ; R213.1 2200,914.57 2200,710 2217.4,692.6 ; M202.2 2217.4,692.6
  L2 w7.87: jBAL-LO.3 R203.1@2098.43,496.06
  other v1: 2150,500
CELL3: jBAL-LO.4 M203.2 R204.1 R214.1 R234.1 | length 802.8
  L1 w7.87: R234.1 2000,564.57 2000,675.2 2017.4,692.6 ; R214.1 2000,914.57 2000,710 2017.4,692.6 ; M203.2 2017.4,692.6
  L2 w7.87: R204.1@1900,497.64 2000,397.64 jBAL-LO.4
  other v1: 1950,500
CELL4: jBAL-LO.5 M204.2 R205.1 R215.1 R235.1 | length 847.2
  L1 w7.87: R235.1 1800,564.57 1800,675.2 1817.4,692.6 ; R215.1 1800,914.57 1800,710 1817.4,692.6 ; M204.2 1817.4,692.6
  L2 w7.87: R205.1@1700,497.64 1703.94,497.64 jBAL-LO.5
  other v1: 1750,500
CELL5: jBAL-LO.6 M205.2 R206.1 R216.1 R236.1 | length 948.8
  L1 w7.87: R236.1 1600,564.57 1600,675.2 1617.4,692.6 ; R216.1 1600,914.57 1600,710 1617.4,692.6 ; M205.2 1617.4,692.6
  L2 w7.87: R206.1@1500,497.64 1597.64,400 1703.15,400 jBAL-LO.6
  other v1: 1550,500
CELL6: jBAL-HI.1 jBAL-LO.7 M206.2 R207.1 R217.1 R237.1 | length 1336.9
  L1 w7.87: R237.1 1400,564.57 1400,675.2 1417.4,692.6 ; R217.1 1400,914.57 1400,710 1417.4,692.6 ; M206.2 1417.4,692.6
  L2 w7.87: jBAL-HI.1 1292.91,497.64 1300,497.64 1397.64,400 1500,400 1600,300 jBAL-LO.7
  other v1: 1350,500
CELL7: jBAL-HI.2 M207.2 R208.1 R218.1 R238.1 | length 804.1
  L1 w7.87: R238.1 1200,564.57 1200,675.2 1217.4,692.6 ; R218.1 1200,914.57 1200,710 1217.4,692.6 ; M207.2 1217.4,692.6
  L2 w7.87: jBAL-HI.2 996.85,394.49 R208.1@1100,497.64
  other v1: 1150,500
CELL8: jBAL-HI.3 M208.2 R209.1 R219.1 R239.1 | length 759.8
  L1 w7.87: R239.1 1000,564.57 1000,675.2 1017.4,692.6 ; R219.1 1000,914.57 1000,710 1017.4,692.6 ; M208.2 1017.4,692.6
  L2 w7.87: jBAL-HI.3 R209.1@898.43,496.06
  other v1: 950,500
CELL9: jBAL-HI.4 M209.2 R20A.1 R21A.1 R23A.1 | length 802.8
  L1 w7.87: R23A.1 800,564.57 800,675.2 817.4,692.6 ; R21A.1 800,914.57 800,710 817.4,692.6 ; M209.2 817.4,692.6
  L2 w7.87: R20A.1@700,497.64 800,397.64 jBAL-HI.4
  other v1: 750,500
CELLA: jBAL-HI.5 M20A.2 R20B.1 R21B.1 R23B.1 | length 847.2
  L1 w7.87: R23B.1 600,564.57 600,675.2 617.4,692.6 ; R21B.1 600,914.57 600,710 617.4,692.6 ; M20A.2 617.4,692.6
  L2 w7.87: R20B.1@500,497.64 503.94,497.64 jBAL-HI.5
  other v1: 550,500
CELLB: jBAL-HI.6 M20B.2 R20C.1 R21C.1 R23C.1 | length 948.8
  L1 w7.87: R23C.1 400,564.57 400,675.2 417.4,692.6 ; R21C.1 400,914.57 400,710 417.4,692.6 ; M20B.2 417.4,692.6
  L2 w7.87: R20C.1@300,497.64 397.64,400 503.15,400 jBAL-HI.6
  other v1: 350,500
CELLC: jBAL-HI.7 M20C.2 R21D.1 | length 983.2
  L1 w7.87: R21D.1 200,914.57 200,710 217.4,692.6 ; v1(200,400) 200,675.2 217.4,692.6 ; M20C.2 217.4,692.6
  L2 w7.87: v1(200,400) 300,400 400,300 jBAL-HI.7
CSEL: R10.1 U10.44 | length 189.3
  L1 w7.87: U10.44 2203.31,1606.69 2190,1620 2190,1640 2210,1660 2240,1660 2250,1670 R10.1
D2: jP2.3
D3: jP2.4
D4: jP2.5
D5: jP2.6
D6: jP2.7
D7: jP2.8
D8: jP4.1
D9: jP4.2
D10: jP4.3 R10.2 | length 960.1
  L1 w7.87: R10.2 v1(2250,1830)
  L2 w7.87: jP4.3 1440,1940 1460,1920 2160,1920 v1(2250,1830)
D11: jP4.4 R12.2 | length 1252.5
  L1 w7.87: R12.2 v1(2070,1830)
  L2 w7.87: jP4.4 1290,2050 1220,2050 1189.84,2019.84 1189.84,1907.56 1237.4,1860 2040,1860 v1(2070,1830)
D12: jP4.5 R11.2 | length 1091.8
  L1 w7.87: R11.2 v1(2170,1830)
  L2 w7.87: jP4.5 1240,1920 1270,1890 2110,1890 v1(2170,1830)
D13: jP4.6 R13.2 | length 1047
  L1 w7.87: R13.2 v1(1990,1830)
  L2 w7.87: jP4.6 1140,1860 1170,1830 v1(1990,1830)
GND: C30.2 C32.2 C35.2 D32.1 jP1.2 jP1.3 jP4.7 M31.2 R30.1 R31.2 | length 4059.7
  L1 w7.87: C32.2@1140,1895.43 C32.2 1254.57,1885.43 1269.45,1870.55 D32.1 1620.55,1850 R30.1
  L2 w7.87: 20,1840 20,100 100,20 1520,20 jP1.3 jP1.2
IO1: R16.2 U10.35 | length 366.5
  L1 w7.87: U10.35 2291.69,1429.53 2320,1457.84 2320,1530 2352.99,1562.99 2422.99,1562.99 2450,1590 R16.2
IO2: R15.2 U10.36 | length 267.9
  L1 w7.87: U10.36 2283.53,1449.21 2300,1465.68 2300,1540 2370,1610 R15.2
MISO: R11.1 U10.43 | length 185.5
  L1 w7.87: R11.1 2170,1602.16 2185.15,1587.01 U10.43
MOSI: R12.1 U10.42 | length 255.3
  L1 w7.87: R12.1@2070,1718.48 2070,1674.32 2177,1567.32 U10.42
NetC31_1: C31.1 D31.2 L32.1 | length 276.1
  L1 w7.87: D31.2 C31.1@1135.43,1670 ; C31.1 1250,1664.57 1285.43,1700 L32.1
NetC31_2: C31.2 C32.1 | length 79.1
  L1 w7.87: C31.2 C32.1
NetC33_2: C33.2 C34.1 | length 79.1
  L1 w7.87: C33.2 C34.1
NetC35_1: C35.1 R35.2 | length 109.1
  L1 w7.87: R35.2 C35.1
NetD15_2: D15.2 R15.1 | length 89.1
  L1 w7.87: R15.1 D15.2
NetD16_2: D16.2 R16.1 | length 89.1
  L1 w7.87: R16.1 D16.2
NetD17_2: D17.2 R17.1 | length 89.1
  L1 w7.87: R17.1 D17.2
NetD31_1: D31.1 L31.2 M31.3 R35.1 | length 324.8
  L1 w7.87: L31.2 762.91,1642.91 784.57,1664.57 R35.1 ; R35.1@820,1670 D31.1 933.07,1696.3 950,1713.23 M31.3@950,1745.71
NetD32_2: D32.2 L32.2 R32.1 | length 216.4
  L1 w7.87: L32.2 D32.2@1589.45,1700 ; D32.2@1610.55,1700 R32.1
NetRT1_1: 
NetRT1_2: 
NetRT2_1: 
NetRT2_2: 
NFB: 
PFB: 
PWM: M31.1 R31.1 | length 796
  L1 w7.87: R31.1 v1(1050,1910) ; M31.1@987.4,1834.29 M31.1 R31.1@987.4,1908.03
  L2 w7.87: 500,1650 790,1650 v1(1050,1910)
RESET: jP1.6
RX: jP2.1
S1: R221.1 U10.25 | length 600.4
  L1 w7.87: U10.25 2397.32,1232.68 2500,1130 v1(2500,1100) ; v1(2500,1000) 2500,920 2535.43,884.57 R221.1
  L2 w7.87: v1(2500,1000) v1(2500,1100)
S2: R222.1 U10.23 | length 413.4
  L1 w7.87: U10.23 2286.69,1193.31 2300,1180 v1(2300,1100) ; v1(2300,1000) 2300,920 2335.43,884.57 R222.1
  L2 w7.87: v1(2300,1000) v1(2300,1100)
S3: R223.1 U10.21 | length 609.8
  L1 w7.87: U10.21 1912.99,1212.99 1900,1200 1900,1170 1910,1160 2070,1160 2100,1130 v1(2100,1100) ; v1(2100,1000) 2100,920 2135.43,884.57 R223.1
  L2 w7.87: v1(2100,1000) v1(2100,1100)
S4: R224.1 U10.19 | length 566.1
  L1 w7.87: v1(1900,1000) 1900,920 1935.43,884.57 R224.1 ; v1(1900,1100) 1860,1100 1830,1130 1830,1190 1892.36,1252.36 U10.19
  L2 w7.87: v1(1900,1000) v1(1900,1100)
S5: R225.1 U10.17 | length 619
  L1 w7.87: v1(1700,1000) 1700,920 1735.43,884.57 R225.1 ; v1(1700,1100) 1790,1190 1790,1210 1871.73,1291.73 U10.17
  L2 w7.87: v1(1700,1000) v1(1700,1100)
S6: R226.1 U10.15 | length 823.6
  L1 w7.87: v1(1500,1000) 1500,920 1535.43,884.57 R226.1 ; v1(1500,1100) 1540,1140 1660,1140 1851.1,1331.1 U10.15
  L2 w7.87: v1(1500,1000) v1(1500,1100)
S7: R227.1 U10.13 | length 1039.9
  L1 w7.87: v1(1300,1000) 1300,920 1335.43,884.57 R227.1 ; v1(1300,1100) 1380,1180 1640,1180 1830.47,1370.47 U10.13
  L2 w7.87: v1(1300,1000) v1(1300,1100)
S8: R228.1 U10.11 | length 1256.2
  L1 w7.87: v1(1100,1000) 1100,920 1135.43,884.57 R228.1 ; v1(1100,1100) 1220,1220 1620,1220 1809.84,1409.84 U10.11
  L2 w7.87: v1(1100,1000) v1(1100,1100)
S9: R229.1 U10.9 | length 1472.5
  L1 w7.87: v1(900,1000) 900,920 935.43,884.57 R229.1 ; v1(900,1100) 1060,1260 1600,1260 1789.21,1449.21 U10.9
  L2 w7.87: v1(900,1000) v1(900,1100)
S10: R22A.1 U10.7 | length 1688.8
  L1 w7.87: v1(700,1000) 700,920 735.43,884.57 R22A.1 ; v1(700,1100) 760,1160 890,1160 1030,1300 1580,1300 1768.58,1488.58 U10.7
  L2 w7.87: v1(700,1000) v1(700,1100)
S11: R22B.1 U10.5 | length 1905.1
  L1 w7.87: v1(500,1000) 500,920 535.43,884.57 R22B.1 ; v1(500,1100) 600,1200 870,1200 1010,1340 1560,1340 1747.95,1527.95 U10.5
  L2 w7.87: v1(500,1000) v1(500,1100)
S12: R22C.1 U10.3 | length 2121.4
  L1 w7.87: v1(300,1000) 300,920 335.43,884.57 R22C.1 ; v1(300,1100) 440,1240 850,1240 990,1380 1540,1380 1727.32,1567.32 U10.3
  L2 w7.87: v1(300,1000) v1(300,1100)
SCLK: R13.1 U10.41 | length 330.3
  L1 w7.87: R13.1 1990,1690 2010,1670 2046.48,1670 2168.85,1547.64 U10.41
TX: jP2.2
VIN: jP1.1
VREF: C16.2 R18.1 R19.1 U10.31 | length 825.3
  L1 w7.87: U10.31 2450.79,1350.79 2470,1370 ; C16.2 2470,1370 ; v1(2500,1360) 2480,1360 2470,1370 ; v1(2610,1160) R18.1@2610,1204.57 ; R19.1 v1(2630,1480)
  L2 w7.87: v1(2500,1360) 2520,1360 2540,1360 ; v1(2610,1160) 2610,1210 2560,1260 2560,1340 2540,1360 ; v1(2630,1480) 2630,1450 2560,1380 2540,1360
VREG: C15.2 D15.1 D16.1 D17.1 R14.1 U10.32 U10.33 | length 1171.2
  L1 w7.87: U10.32 2349.53,1370.47 ; U10.33 v1@2330,1390.16 ; R14.1 v1(2300,1900) 2335.43,1900 D15.1 D16.1 D17.1 ; v1(2330,1390) 2349.53,1370.47 ; C15.2 2390,1381.1 2379.37,1370.47 2349.53,1370.47
  L2 w7.87: v1(2300,1900) 2400,1800 2400,1460 v1(2330,1390)
VTMP1: C18.2 jTmp1.1 R18.2 U10.29 | length 2689.1
  L1 w7.87: U10.29 2514.02,1311.42 C18.2 R18.2
  L2 w7.87: jTmp1.1 1411.1,220 2341.72,220 2541.72,420 2591.72,420 2650,478.28 2650,1215.43 v1(2590,1275.43)
VTMP2: C19.2 jTmp2.1 R19.2 U10.30 | length 4026.9
  L1 w7.87: U10.30 2516.54,1331.1 C19.2 R19.2
  L2 w7.87: jTmp2.1 231.1,200 2350,200 2550,400 2600,400 2670,470 2670,1284.57 v1(2590,1364.57)
WD: R17.2 U10.34 | length 465.4
  L1 w7.87: U10.34 2299.84,1409.84 2340,1450 2340,1520.47 2359.53,1540 2500,1540 2530,1570 R17.2

## Polygon pours and split planes (outlines as drawn)
-VB on L1 "-Vb" (solid, remove dead copper, pour order 1000): 1840,1950 2600,1950 2600,1600 2700,1500 2700,1100 2000,1100 2000,1595.67 1995.67,1600 1840,1600
GND on L1 "GND" (solid, pour order 1001): 0,2100 1250,2100 1250,1600 0,1600
BALR1 on L2 "BALR" (solid, pour order 1013): 2420,600 2580,600 2580,1600 2420,1600
BALR2 on L2 "BALR" (solid, pour order 1012): 2220,600 2380,600 2380,1600 2220,1600
BALR3 on L2 "BALR" (solid, pour order 1011): 2020,600 2180,600 2180,1600 2020,1600
BALR4 on L2 "BALR" (solid, pour order 1010): 1820,600 1980,600 1980,1600 1820,1600
BALR5 on L2 "BALR" (solid, pour order 1009): 1620,600 1780,600 1780,1600 1620,1600
BALR6 on L2 "BALR" (solid, pour order 1008): 1420,600 1580,600 1580,1600 1420,1600
BALR7 on L2 "BALR" (solid, pour order 1007): 1220,600 1380,600 1380,1600 1220,1600
BALR8 on L2 "BALR" (solid, pour order 1006): 1020,600 1180,600 1180,1600 1020,1600
BALR9 on L2 "BALR" (solid, pour order 1005): 820,600 980,600 980,1600 820,1600
BALRA on L2 "BALR" (solid, pour order 1004): 620,600 780,600 780,1600 620,1600
BALRB on L2 "BALR" (solid, pour order 1003): 420,600 580,600 580,1600 420,1600
BALRC on L2 "BALR" (solid, pour order 1002): 220,600 380,600 380,1600 220,1600

## Keep-outs
Keep-Out Layer:
  lines w7.87: 2500,2098.43 2600,1998.43 2600,1598.82 2702.76,1496.06 ; 2600,0 2600,50.79 2702.76,153.54 ; 0,0 0,2098.43 2702.76,2098.43 2702.76,0 2598.42,0 0,0

## Other copper
L1:
  pour cut-out: 2702.76,0 2600,0 2600,50.79 2702.76,153.54
  pour cut-out: 2702.76,2098.43 2702.76,1496.06 2600,1598.82 2600,1998.43 2500,2098.43
L2:
  pour cut-out: 2702.76,2098.43 2702.76,1496.06 2600,1598.82 2600,1998.43 2500,2098.43
  pour cut-out: 2702.76,0 2600,0 2600,50.79 2702.76,153.54

## Silkscreen, mask and mechanical layers (free items; w line width, h text height)
Top Overlay:
  circle w10: c600,2000 r75
  circle w10: c550,100 r75
  circle w10: c2600,300 r75
  lines w7.87: 2500,2100 2600,2000 2600,1600 2700,1500 ; 2600,0 2600,50 2700,150
  text "AREF" at 980,2080 h19.68 r180
  text "GND" at 1070,2080 h19.68 r180
  text "D13" at 1160,2080 h19.68 r180
  text "D12" at 1260,2080 h19.68 r180
  text "D11" at 1360,2080 h19.68 r180
  text "D10" at 1460,2080 h19.68 r180
  text "D9" at 1560,2080 h19.68 r180
  text "D8" at 1660,2080 h19.68 r180
  text "D7" at 1820,2080 h19.68 r180
  text "D6" at 1920,2080 h19.68 r180
  text "D5" at 2020,2080 h19.68 r180
  text "D4" at 2120,2080 h19.68 r180
  text "D3" at 2220,2080 h19.68 r180
  text "D2" at 2320,2080 h19.68 r180
  text "TX" at 2420,2080 h19.68 r180
  text "RX" at 2500,2080 h19.68 r180
  text "OSC" at 180,1560 h50
  text "BOOST" at 780,1560 h50
  text "Zener" at 1490,1550 h50
  text "Arduino BMS Board - Rev1.1, Nov. 2018" at 100,1400 h50
  text "Designed by A.R.Taylor" at 100,1300 h50
  text "Ref" at 2490,1220 h50 r90
  text "Reg" at 2400,1210 h50 r90
  text "C12" at 240,1150 h50
  text "C11" at 440,1150 h50
  text "C10" at 640,1150 h50
  text "C09" at 830,1150 h50
  text "C08" at 1030,1150 h50
  text "C07" at 1230,1150 h50
  text "C06" at 1430,1150 h50
  text "C05" at 1630,1150 h50
  text "0V" at 2490,250 h50 r90
  text "HI-PAK" at 670,70 h50
  text "LO" at 1930,40 h50 r90
  text "RSET" at 1263.78,27.56 h19.68
  text "3V3" at 1374.02,27.56 h19.68
  text "5V" at 1480.31,27.56 h19.68
  text "GND" at 1574.8,27.56 h19.68
  text "GND" at 1673.23,27.56 h19.68
  text "VIN" at 1775.59,27.56 h19.68
  text "A0" at 1984.25,27.56 h19.68
  text "A1" at 2086.61,27.56 h19.68
  text "A2" at 2185.04,27.56 h19.68
  text "A3" at 2283.46,27.56 h19.68
  text "A4" at 2381.89,27.56 h19.68
  text "A5" at 2484.25,27.56 h19.68
  text "48V" at 460,20 h50 r90
  text "24V" at 1130,20 h50 r90

## Dimensions
0,0 to 0,2098.43 on Mechanical 1
0,0 to 2702.76,0 on Mechanical 1
0,0 to 0,2098.43 on Mechanical 1
0,0 to 2702.76,0 on Mechanical 1